# EAGLE board M5StickCplusbattery (EAGLE 9.6.2)
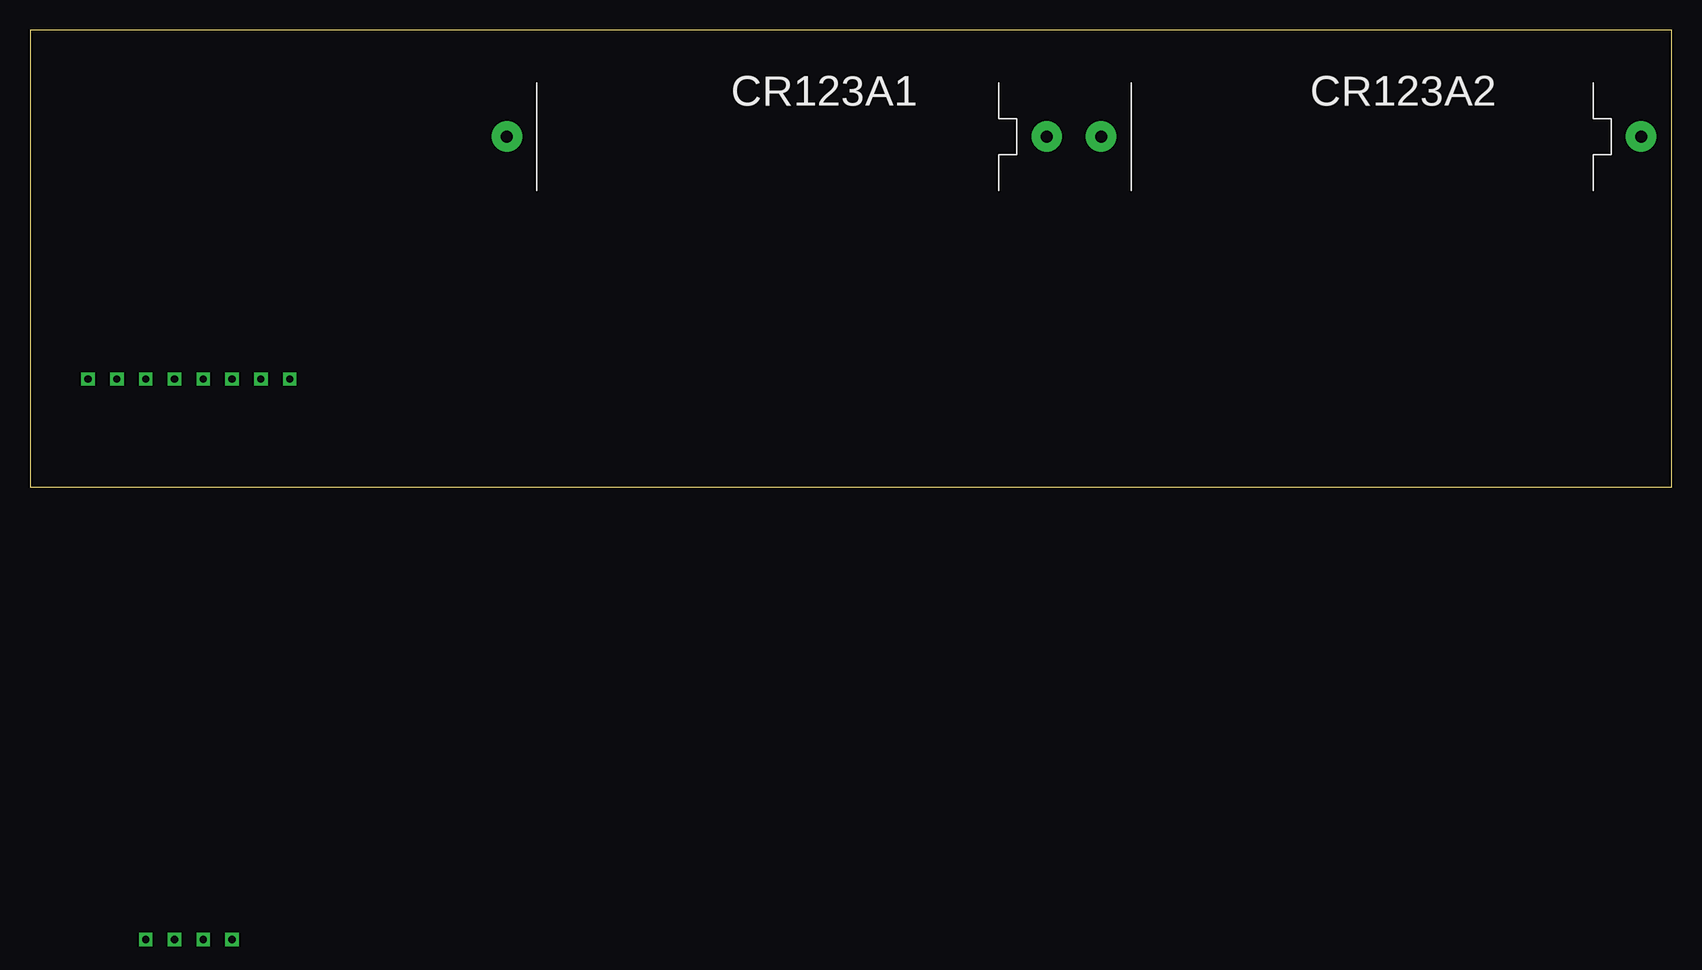
[diagram p0: board, top side]
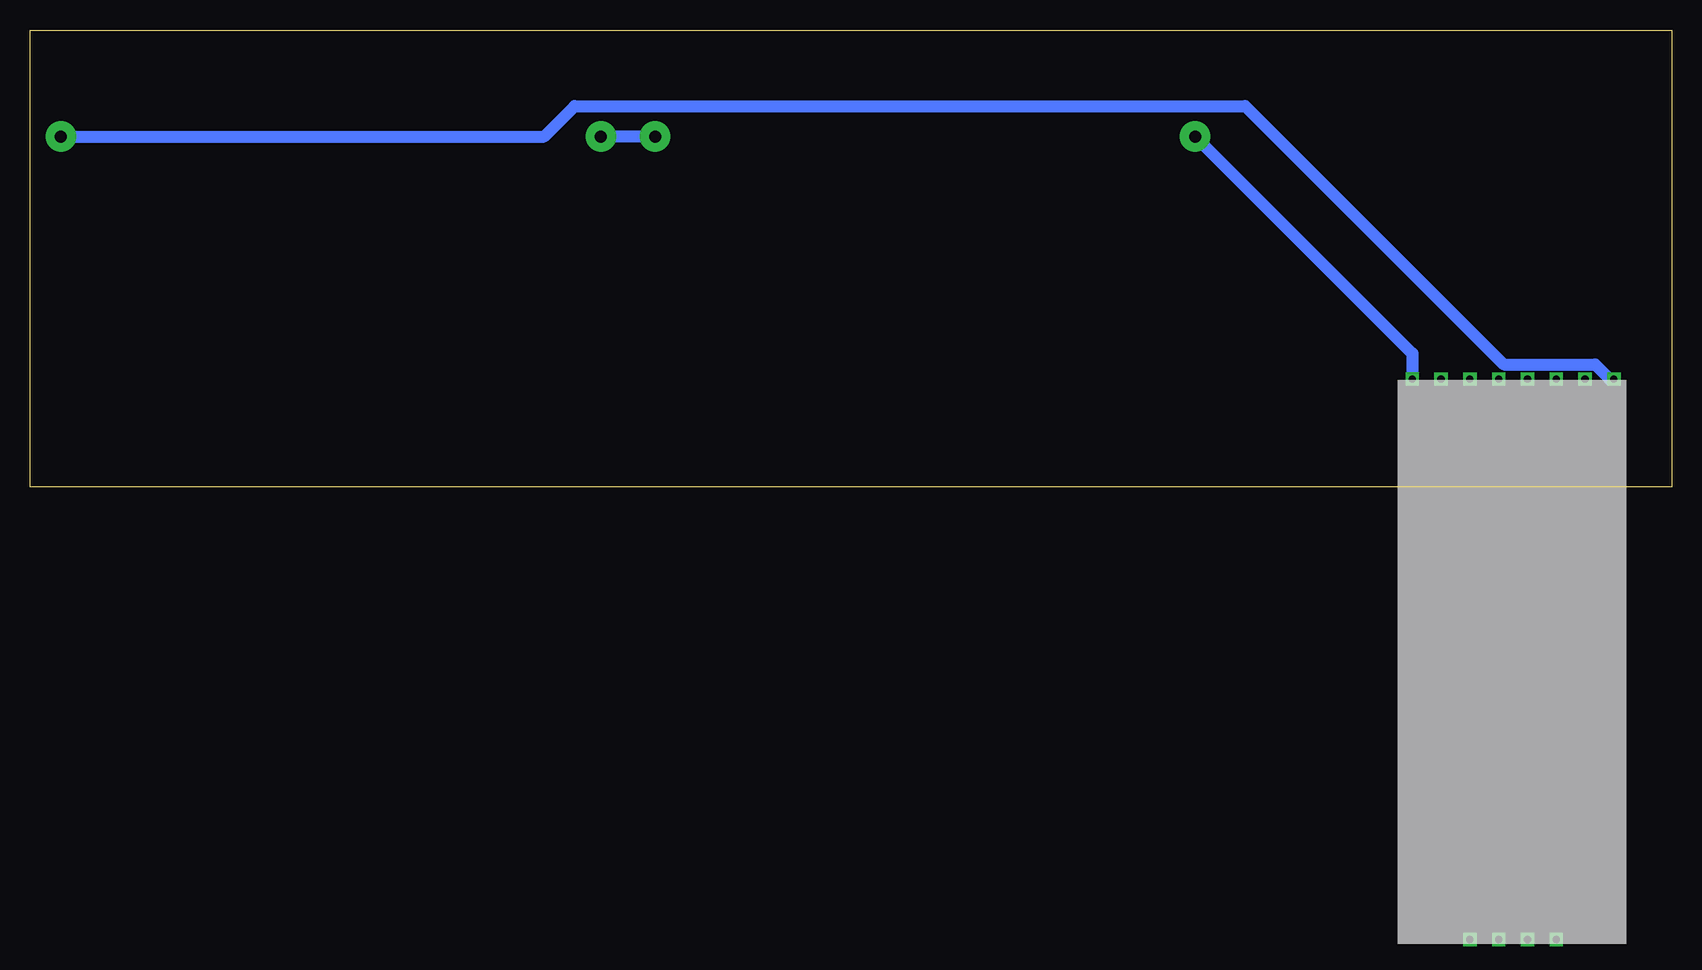
[diagram p1: board, bottom side, seen from below]

Size 136.83 x 38.09 mm. Coordinates in mm from the lower left corner, seen from the top.
Outline: 0,0 136.83,0 136.83,38.09 0,38.09 0,0
Copper layers (1*16): Top 0.035mm / dielectric 1.5mm / Bottom 0.035mm
Design rules "default": minimum track width 6mil, minimum drill 0.35mm, track to track 6mil, track to pad 6mil, pad to pad 6mil, via to via 6mil, smd to smd 6mil, copper to edge 40mil, drill to drill 6mil, minimum pad ring 10mil, minimum via ring 8mil, stop-mask expansion 4mil, vias tented up to drill 0mil, thermal gap 10mil

## Footprints (pad centres in the part's own frame; a part is rotated, then mirrored left to right if it is on the bottom)
12BH412 = drill 1 pad 2.54: + 22.5,0; - -22.5,0
M5STICK = drill 0.6 square: 3V3 105.6,-1329.6; 5VIN 108,-1329.6; 5VOUT 93.6,-1329.6; BAT 103.2,-1329.6; G26 96,-1329.6; G32 100.8,-1376.33; G33 103.2,-1376.33; G36/G25 98.4,-1329.6; GND 91.2,-1329.6; GND1 96,-1376.33; GO 100.8,-1329.6; VOUT 98.4,-1376.33

## Placement (x,y rotation side)
CR123A1  AAA  [12BH412]  62.23,29.21 0 top
CR123A2  AAA  [12BH412]  111.76,29.21 0 top
U$1  M5STICKCPLUS  [M5STICK]  -86.36,1338.58 0 top

## Library data of the parts
CR123A1 CR123A2 = adafruit
U$1 = M5stickcPlus

## Nets
N$1: CR123A1.+ CR123A2.-
N$2: CR123A2.+ U$1.GND
N$3: CR123A1.- U$1.5VIN

## Tracks (layer width: path | path; a pad name or v marks a point on that pad's centre or on a via)
N$1
  Bottom 1.016: CR123A1.+ CR123A2.-
N$2
  Bottom 1.016: CR123A2.+ 93.98,29.21 91.44,31.75 35.56,31.75 14,10.19 6.41,10.19 5.2,8.98 U$1.GND
N$3
  Bottom 1.016: CR123A1.- 21.64,11.12 U$1.5VIN